# Altium PCB ART_CARD Rev 5.PcbDoc (part 5 of 13)
Units mil, origin at the board's own origin, x right, y up, seen from the top; angles counter-clockwise.
Board outline 6600.39 x 3903.54 mil, 8 copper layers (Top, Inner Layer 2, Inner Layer 3, Inner Layer 4, Inner Layer 5, Inner Layer 6, Inner Layer 7, Bottom), stack 63.111 mil thick; 542 components, 382 nets, 2410 pads, 1433 vias.
Unrouted connection lines stored in the file: 1247.
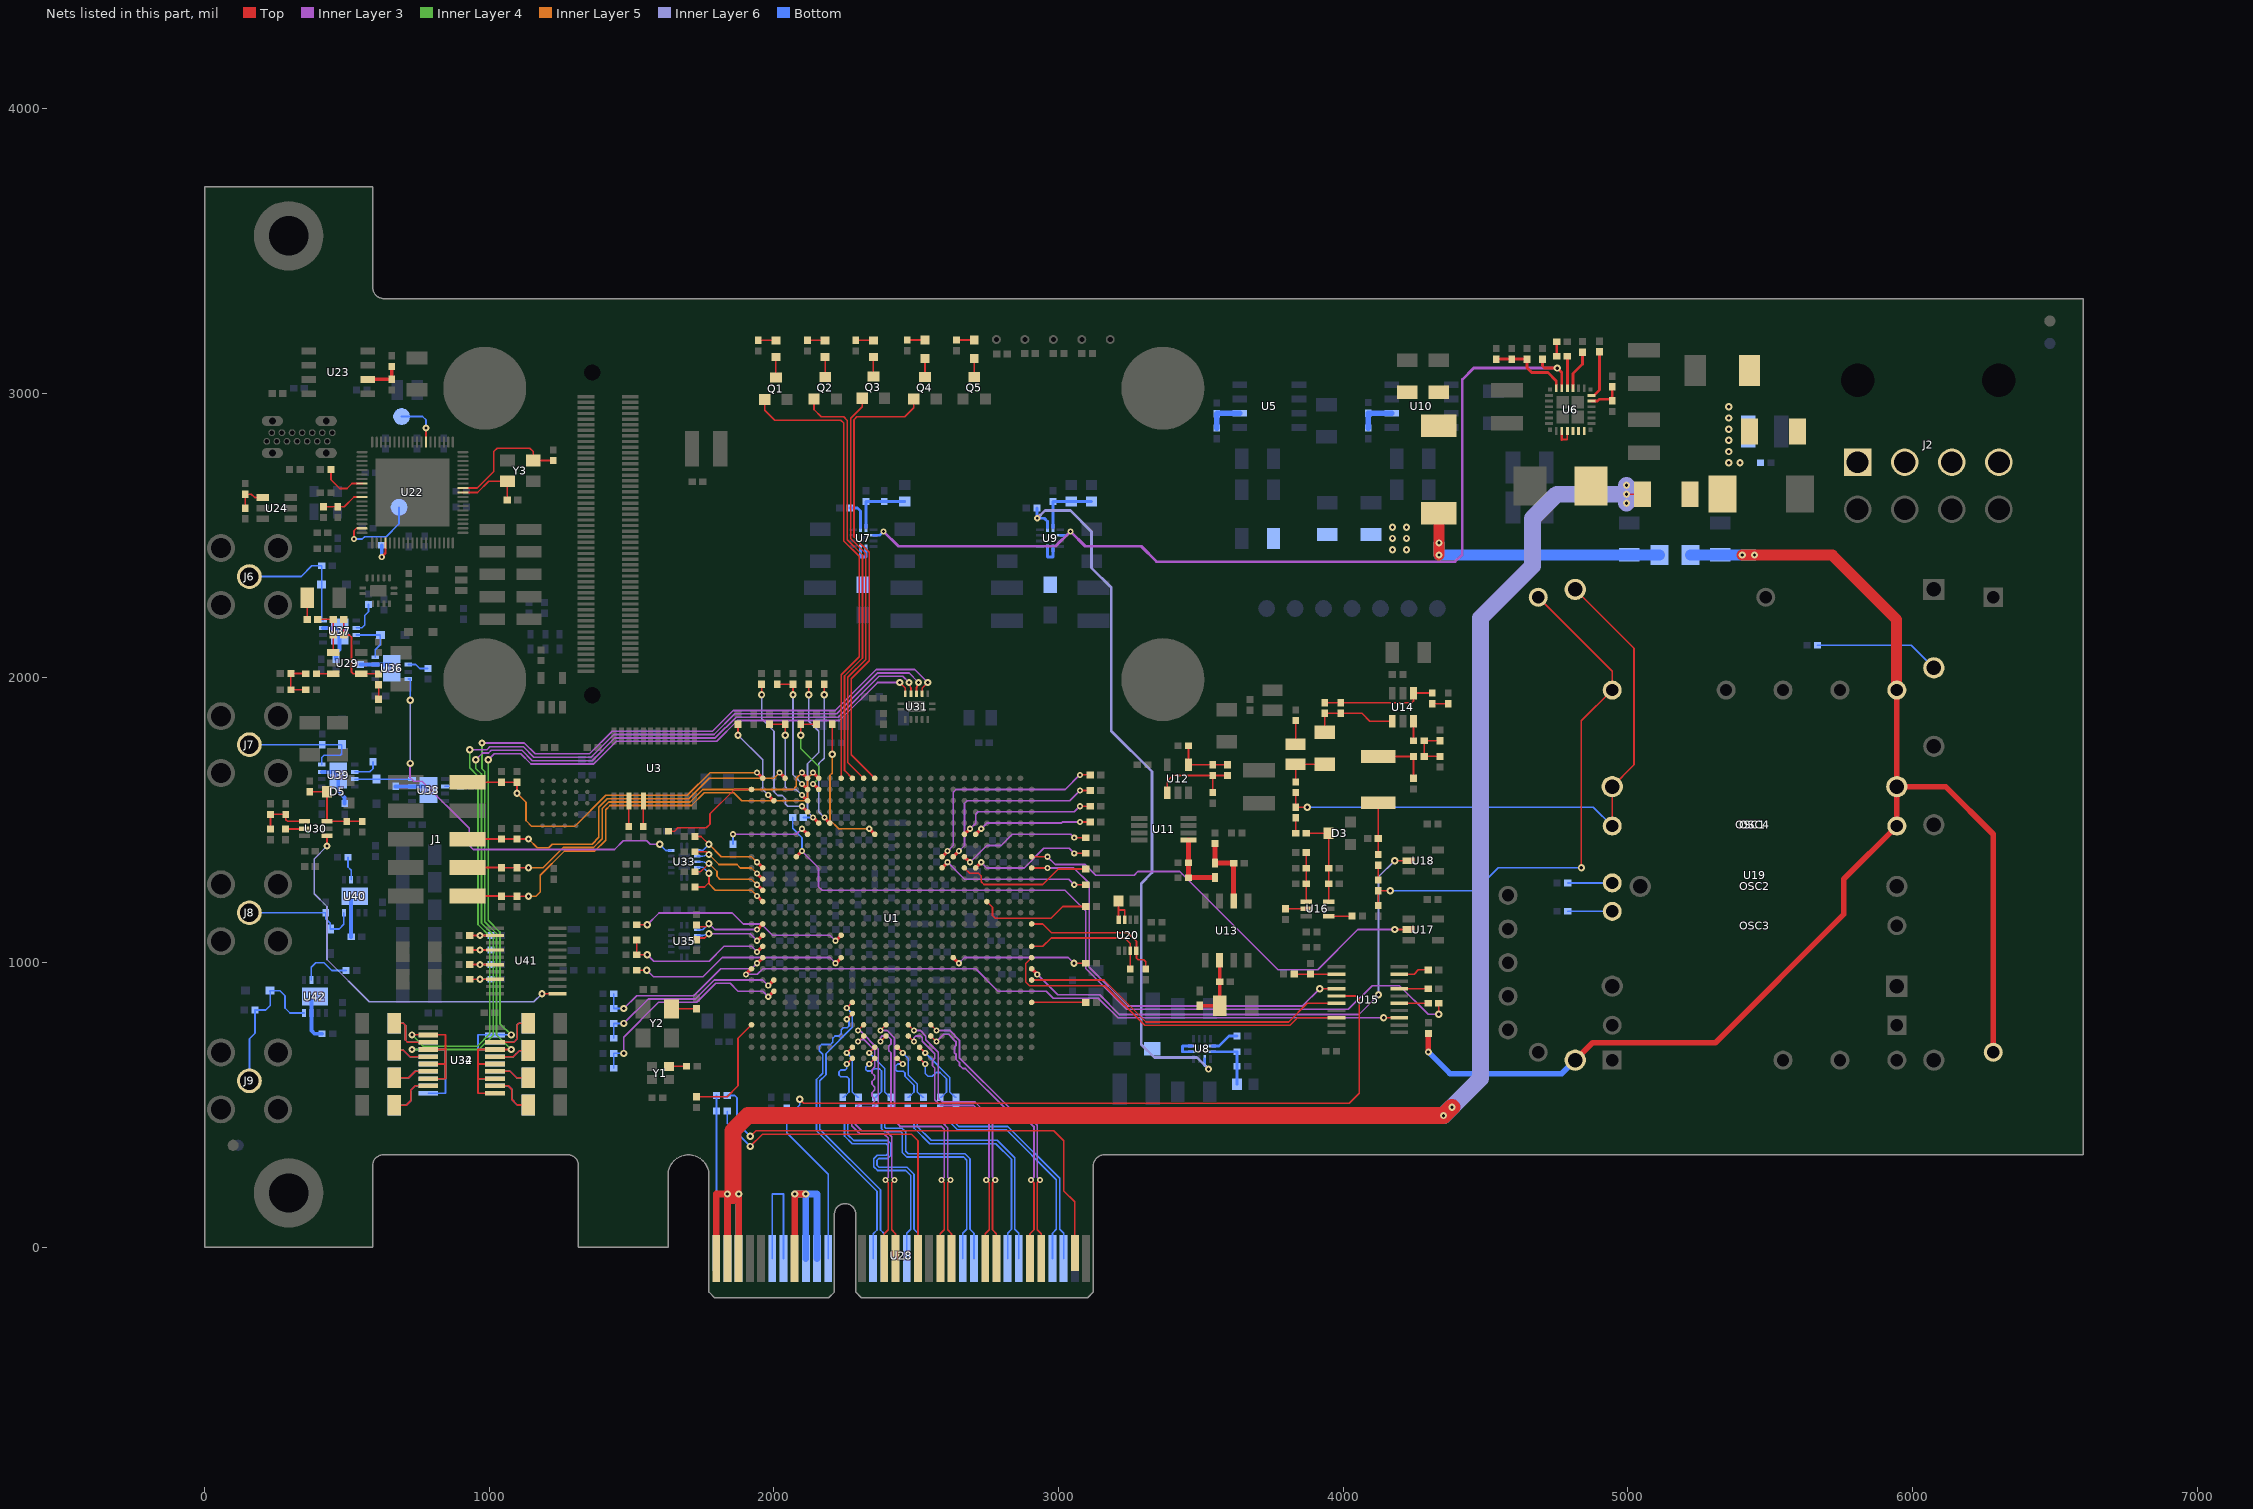
[diagram p11: the nets of this part, all layers, seen from the top]

## Via types
v1: diameter 25.59, hole 11.81, Top to Bottom, 915 vias
v2: diameter 21.65, hole 9.84, Top to Bottom, 518 vias

## Nets (pads, with @x,y where several pads share a name; then routed paths per layer and width w, separated by ;. In a path a pad name is that pad's centre, name@x,y a point inside that pad or via, vN(x,y) a via of type N, cw(c..) or ccw(c..) an arc to the next point about the centre after c; other vN are vias at no path point) (continued)
IO0: C206.1 D6.2 J6.1 U37.4 | length 465.7
  Bottom w5.91: J6.1@157.48,2356.3 339.57,2356.3 376.97,2393.7 C206.1@411.42,2393.7 D6.2@411.42,2328.74 411.42,2202.76 415.35,2202.76 U37.4@416.34,2201.77
IO1: C213.1 D7.2 J7.1 U39.4 | length 457.5
  Bottom w5.91: J7.1@157.48,1765.75 C213.1@413.39,1765.75 D7.2@482.28,1765.75 482.28,1734.25 476.38,1728.35 419.29,1728.35 411.42,1720.47 U39.4@411.42,1695.87
IO2: C217.1 J8.1 U40.4 VR5.1 | length 426.8
  Bottom w5.91: J8.1@157.48,1175.2 411.42,1175.2 C217.1@425.2,1175.2 425.2,1154.53 440.94,1138.78 VR5.1@440.94,1118.11 472.44,1118.11 489.17,1134.84 U40.4@489.17,1175.2
IO3: C222.1 J9.1 U42.4 VR6.1 | length 547.2
  Bottom w5.91: J9.1@157.48,584.65 157.48,732.28 177.17,751.97 C222.1@177.17,833.66 214.57,833.66 230.32,849.41 230.32,898.31 228.88,899.74 VR6.1@230.32,901.57 264.76,901.57 282.48,883.86 282.48,840.55 300.2,822.83 U42.4@349.41,822.83
JTAG_TCK: C79.1 J1.1 R42.1 U1.Y1 | length 1583.3
  Top w5.91: J1.1@923.23,1234.06 1043.31,1234.06 C79.1@1043.31,1233.27 R42.1@1097.44,1233.27 v1(1137.8,1233.27)
  Top w11.81: v2(2137.8,1667.32) U1.Y1@2157.48,1647.64
  Inner Layer 5 w5.91: v1(1137.8,1233.27) 1164.37,1233.27 1179.13,1248.03 1179.13,1307.09 1264.27,1392.22 1371.06,1392.22 1408.96,1430.12 1408.96,1536.91 1424.21,1552.17 1710.63,1552.17 1754.92,1596.46 1859.25,1596.46 1886.81,1568.9 2108.27,1568.9 2118.11,1578.74 2118.11,1647.64 v2(2137.8,1667.32)
JTAG_TDI: C78.1 J1.9 R37.2 U1.AE1 | length 1248.1
  Top w5.91: J1.9@923.23,1634.06 1041.34,1634.06 1041.54,1633.86 C78.1@1043.31,1633.86 R37.2@1097.44,1633.86 v1(1097.44,1594.49)
  Top w11.81: v2(1940.94,1667.32) U1.AE1@1960.63,1647.64
  Inner Layer 5 w5.91: v1(1097.44,1594.49) 1128.94,1562.99 1128.94,1499.02 1148.62,1479.33 1301.18,1479.33 1409.45,1587.6 1695.87,1587.6 1775.59,1667.32 v2(1940.94,1667.32)
JTAG_TDO: C83.1 J1.3 R39.2 U1.AA1 | length 1420.4
  Top w5.91: J1.3@923.23,1334.06 1042.91,1334.06 C83.1@1043.31,1333.66 R39.2@1097.44,1333.66 v1(1137.8,1333.66)
  Top w11.81: v2(2098.43,1667.32) U1.AA1@2118.11,1647.64
  Inner Layer 5 w5.91: v1(1137.8,1333.66) 1188.98,1333.66 1259.84,1404.53 1366.14,1404.53 1396.65,1435.04 1396.65,1541.34 1419.29,1563.98 1705.71,1563.98 1750,1608.27 2067.91,1608.27 2078.74,1619.09 2078.74,1647.64 v2(2098.43,1667.32)
JTAG_TMS: C82.1 J1.5 R38.2 U1.AC1 | length 1308.5
  Top w5.91: J1.5@923.23,1434.06 C82.1@1043.31,1434.06 R38.2@1097.44,1434.06 v1(1137.8,1434.06)
  Top w11.81: v2(2019.69,1667.32) U1.AC1@2039.37,1647.64
  Inner Layer 5 w5.91: v1(1137.8,1434.06) 1168.31,1403.54 1208.66,1403.54 1221.46,1416.34 1361.22,1416.34 1384.84,1439.96 1384.84,1546.26 1414.37,1575.79 1700.79,1575.79 1772.64,1647.64 2000,1647.64 v2(2019.69,1667.32)
JTAG_TRST: R8.2 U1.AA6 | length 313.6
  Top w11.81: v2(2098.43,1470.47) U1.AA6@2118.11,1450.79
  Inner Layer 3 w5.91: v2(1856.3,1450.79) 2078.74,1450.79 v2(2098.43,1470.47)
  Bottom w5.91: R8.2@1856.3,1415.35 v2(1856.3,1450.79)
LED_G0: Q1.1 U1.V1 | length 1630.3
  Top w5.91: Q1.1@1967.52,2978.35 1967.52,2940.94 2002.95,2905.51 2235.24,2905.51 2245.08,2895.67 2245.08,2481.3 2299.21,2427.17 2299.21,2074.8 2236.22,2011.81 U1.V1@2236.22,1647.64
LED_G1: Q2.1 U1.U1 | length 1486.8
  Top w5.91: Q2.1@2140.75,2980.31 2140.75,2942.91 2166.34,2917.32 2245.08,2917.32 2257.87,2904.53 2257.87,2485.24 2311.02,2432.09 2311.02,2422.24 2311.02,2069.88 2248.03,2006.89 2248.03,1675.2 U1.U1@2275.59,1647.64
LED_G2: Q3.1 U1.T1 | length 1422.3
  Top w5.91: Q3.1@2310.04,2982.28 2310.04,2952.76 2269.69,2912.4 2269.69,2490.16 2322.83,2437.01 2322.83,2427.17 2322.83,2064.96 2259.84,2001.97 2259.84,1702.76 U1.T1@2314.96,1647.64
LED_R0: Q4.1 U1.R1 | length 1600.5
  Top w5.91: U1.R1@2354.33,1647.64 2271.65,1730.31 2271.65,1997.05 2334.65,2060.04 2334.65,2441.93 2281.5,2495.08 2281.5,2907.48 2291.34,2917.32 2459.65,2917.32 2491.14,2948.82 Q4.1@2491.14,2980.31
MSEL0: R36.2 R44.1 U1.Y2 | length 326.8
  Top w5.91: v1(2094.49,1799.21) R44.1@2094.49,1837.6 R36.2@2149.61,1837.6
  Top w11.81: v2(2137.8,1627.95) U1.Y2@2157.48,1608.27
  Inner Layer 4 w5.91: v1(2094.49,1799.21) 2094.49,1751.97 2157.48,1688.98 2157.48,1647.64 v2(2137.8,1627.95)
MSEL1: R35.2 R43.1 U1.AA3 | length 373.7
  Top w5.91: R43.1@1984.25,1837.6 R35.2@2039.37,1837.6 v1(2039.37,1799.21)
  Top w11.81: v2(2098.43,1588.58) U1.AA3@2118.11,1568.9
  Inner Layer 6 w5.91: v1(2039.37,1799.21) 2039.37,1618.11 2049.21,1608.27 2078.74,1608.27 v2(2098.43,1588.58)
MSEL2: R34.2 R41.1 U1.AA2 | length 446.4
  Top w5.91: R41.1@2011.81,1978.35 R34.2@2066.93,1978.35 v1(2066.93,1940.94)
  Top w11.81: v2(2098.43,1627.95) U1.AA2@2118.11,1608.27
  Inner Layer 6 w5.91: v1(2066.93,1940.94) 2066.93,1659.45 v2(2098.43,1627.95)
N14301: C118.1 C119.1 L7.1 R83.2 R84.2 R85.2
  other v1: 4173.23,2450.79 4222.44,2450.79 4173.23,2490.16 4222.44,2490.16 4173.23,2529.53 4222.44,2529.53
N14373: C120.1 L7.2 L8.1 | length 963
  Top w39.37: L7.2@4335.63,2578.74 4336.61,2577.76 v1(4336.61,2474.41) v1(4336.61,2432.09)
  Bottom w5.91: v1(4336.61,2432.09) v1@4337.6,2432.09
  Bottom w39.37: v1(4336.61,2432.09) v1(4336.61,2474.41) ; v1@4337.6,2432.09 C120.1@5004.92,2432.09 L8.1@5110.24,2432.09
N16504: C172.2 R142.2 R146.1 R148.1 | length 161.8
  Top w5.91: C172.2@355.32,1958.66 R148.1@303.15,1958.66 R142.2@303.15,2015.75 354.33,2015.75 R146.1@355.32,2014.76
N16580: R146.2 U29.3 | length 59.1
  Top w5.91: R146.2@392.72,2014.76 U29.3@451.77,2014.76
N16638: C173.1 C174.1 R153.2 U29.1 | length 170.3
  Top w5.91: C173.1@397.64,2205.71 R153.2@451.77,2205.71 C174.1@451.77,2150.59 U29.1@451.77,2089.57
N16650: C173.2 R147.1 | length 75.8
  Top w5.91: C173.2@360.24,2205.71 R147.1@360.24,2281.5
N16672: C174.2 R149.1 R153.1 U29.4 | length 305.3
  Top w5.91: R153.1@489.17,2205.71 C174.2@489.17,2150.59 508.86,2150.59 515.75,2143.7 515.75,2021.65 522.64,2014.76 U29.4@550.2,2014.76 610.22,2014.76 610.72,2014.26 R149.1@611.22,2013.78
N16782: C175.1 R149.2 | length 51.2
  Top w5.91: C175.1@611.22,1925.2 R149.2@611.22,1976.38
N17996: R163.1 U32.18 | length 177.6
  Bottom w5.91: R163.1@666.34,787.4 698.82,787.4 705.71,780.51 705.71,728.35 713.58,720.47 U32.18@785.63,720.47
N18054: R164.1 U32.16 | length 128.7
  Bottom w5.91: R164.1@666.34,691.93 698.82,691.93 721.46,669.29 U32.16@785.63,669.29
N18090: R165.1 U32.14 | length 128.7
  Bottom w5.91: R165.1@666.34,595.47 717.52,595.47 740.16,618.11 U32.14@785.63,618.11
N18130: R166.1 U32.12 | length 168.8
  Bottom w5.91: R166.1@666.34,499.02 708.66,499.02 724.41,514.76 724.41,551.18 740.16,566.93 U32.12@785.63,566.93
N18188: R167.1 U32.9 | length 165.8
  Bottom w5.91: U32.9@1019.49,566.93 1066.93,566.93 1078.74,555.12 1078.74,519.69 1098.43,500 R167.1@1136.81,500
N18258: R168.1 U32.7 | length 126.7
  Bottom w5.91: U32.7@1019.49,618.11 1072.83,618.11 1095.47,595.47 R168.1@1136.81,595.47
N18322: R169.1 U32.5 | length 126.3
  Bottom w5.91: U32.5@1019.49,669.29 1084.65,669.29 1106.3,690.94 R169.1@1136.81,690.94
N18358: R170.1 U32.3 | length 173.9
  Bottom w5.91: U32.3@1019.49,720.47 1086.61,720.47 1098.43,732.28 1098.43,781.5 1104.33,787.4 R170.1@1136.81,787.4
N22150: C176.1 U28.A16 | length 834.9
  Bottom w5.91: C176.1@2242.13,489.17 2246.06,489.17 2263.78,471.46 2263.78,452.76 2250.98,439.96 2248.03,436.98 2248.03,390.75 2275.59,363.19 2394.69,363.19 2399.61,358.27 2399.61,328.71 2394.71,323.82 2363.19,323.82 2350.39,311.02 2350.39,283.46 2364.17,269.69 2462.6,269.69 2480.32,251.97 2480.32,62.99 2466.54,49.21 U28.A16@2466.54,-39.37
N22154: C177.1 U28.A17 | length 834.4
  Bottom w5.91: C177.1@2297.24,489.17 2294.29,489.17 2275.59,470.47 2275.59,447.83 2259.84,432.09 2259.84,395.64 2280.48,375 2396.65,375 2399.58,375 2411.42,363.16 2411.42,323.82 2399.61,312.01 2368.08,312.01 2362.2,306.13 2362.2,288.36 2369.07,281.5 2467.52,281.5 2492.13,256.89 2492.13,62.99 2505.91,49.21 U28.A17@2505.91,-39.37
N22277: C178.1 U28.A21 | length 818.8
  Bottom w5.91: C178.1@2356.3,489.17 2358.27,489.17 2377.95,469.49 2377.95,416.34 2387.8,406.5 2444.88,406.5 2450.79,400.59 2450.79,332.68 2466.54,316.93 2666.34,316.93 2677.17,306.1 2677.17,62.99 2663.39,49.21 U28.A21@2663.39,-39.37
N22309: C179.1 U28.A22 | length 819.4
  Bottom w5.91: C179.1@2411.42,489.17 2408.46,489.17 2389.76,470.47 2389.76,421.23 2392.69,418.31 2449.77,418.31 2462.6,405.48 2462.6,337.57 2471.43,328.74 2671.23,328.74 2688.98,310.99 2688.98,269.69 2688.98,62.99 2702.76,49.21 U28.A22@2702.76,-39.37
N30431: DS1.2 R141.1 | length 62
  Top w5.91: R141.1@1944.88,3186.02 DS1.2@2006.89,3186.02
N30439: DS1.1 Q1.3 | length 71.9
  Top w5.91: Q1.3@2006.89,3055.12 DS1.1@2006.89,3126.97
N43324: DS2.1 Q2.3 | length 69.9
  Top w5.91: Q2.3@2180.12,3057.09 DS2.1@2180.12,3126.97
N43332: DS2.2 R144.1 | length 62
  Top w5.91: R144.1@2118.11,3186.02 DS2.2@2180.12,3186.02
N43584: DS3.1 Q3.3 | length 67.9
  Top w5.91: Q3.3@2349.41,3059.06 DS3.1@2349.41,3126.97
N43592: DS3.2 R152.1 | length 62
  Top w5.91: R152.1@2287.4,3186.02 DS3.2@2349.41,3186.02
N43844: DS4.1 Q4.3 | length 65
  Top w5.91: Q4.3@2530.51,3057.09 DS4.1@2530.51,3122.05
N43852: DS4.2 R154.1 | length 63.4
  Top w5.91: R154.1@2468.5,3187.01 2527.58,3187.01 2528.53,3186.06 2530.51,3186.02 DS4.2@2530.51,3187.01
N70046: L2.1 U6.8 U6.9 U6.10 U6.11 U6.12 | length 80.7
  Top w5.91: 4767.72,2837.6 4787.4,2837.6 U6.9@4787.4,2868.11
  Top w9.84: 4767.72,2837.6 U6.8@4767.72,2868.11
N70274: C92.2 R65.2 R67.1 U6.24 | length 286.5
  Top w9.84: R67.1@4537.4,3120.08 R65.2@4591.54,3120.08 C92.2@4645.67,3120.08 4645.67,3089.57 4662.4,3072.83 4719.49,3072.83 4748.03,3044.29 U6.24@4748.03,3017.72
N70312: R64.2 R70.1 U6.17 | length 124.7
  Top w9.84: U6.17@4872.05,2972.44 4893.7,2972.44 4900.59,2979.33 R64.2@4937.01,2979.33 ; R64.2@4944.88,2973.43 4938.98,2979.33 R64.2@4937.01,2979.33 ; R70.1@4944.88,3022.64 4944.88,2987.2 R64.2@4937.01,2979.33
N70424: R68.1 U6.22 | length 112.2
  Top w9.84: U6.22@4787.4,3017.72 R68.1@4787.4,3129.92
N70428: C95.1 R68.2 | length 51.2
  Top w5.91: R68.2@4750,3129.92 R68.2@4750,3140.75
  Top w9.84: R68.2@4750,3140.75 C95.1@4750,3181.1
N70436: R71.1 U6.18 | length 170.6
  Top w9.84: U6.18@4872.05,2992.13 4880.91,2992.13 4900.59,3011.81 R71.1@4900.59,3145.67
N70452: C96.1 U6.21 | length 140.8
  Top w9.84: U6.21@4807.09,3017.72 4807.09,3068.9 4840.55,3102.36 C96.1@4840.55,3144.69
N75591: L3.1 U7.5 U7.6 | length 80.7
  Bottom w9.84: U7.6@2304.13,2455.71 2304.13,2425.2 2323.82,2425.2 U7.5@2323.82,2455.71
N75717: C99.2 R72.2 R73.1 U7.12 | length 229.3
  Bottom w9.84: U7.12@2323.82,2526.57 C99.2@2323.82,2620.08 R72.2@2387.8,2620.08 R73.1@2459.65,2620.08
N80611: OSC3.E R101.2 | length 156.7
  Bottom w5.91: R101.2@4788.39,1279.53 4856.3,1279.53 4856.69,1279.92 OSC3.E@4944.88,1279.92
N80621: OSC3.D R103.2 | length 156.6
  Bottom w5.91: R103.2@4788.39,1180.12 4788.58,1179.92 OSC3.D@4944.88,1179.92
N80719: OSC4.A R111.2 | length 441.5
  Bottom w5.91: R111.2@5666.34,2115.16 5995.08,2115.16 OSC4.A@6074.8,2035.43
N81470: C132.2 R91.2 R94.1 R96.1 | length 165.4
  Top w5.91: R96.1@4339.57,1724.41 C132.2@4284.45,1724.41 R94.1@4284.45,1779.53 R91.2@4339.57,1779.53
N81584: R92.2 R93.1 | length 52.2
  Top w5.91: R92.2@4123.03,1290.35 R93.1@4123.03,1342.52
N81592: C134.1 L11.1 R93.2 | length 181.3
  Top w5.91: R93.2@4123.03,1379.92 C134.1@4123.03,1436.02 L11.1@4123.03,1561.22
N81604: C132.1 C135.1 L11.2 | length 200.9
  Top w5.91: L11.2@4123.03,1724.21 4246.85,1724.21 C132.1@4247.05,1724.41 C135.1@4247.05,1647.64
N81628: R94.2 U14.3 | length 68.9
  Top w5.91: R94.2@4247.05,1779.53 U14.3@4247.05,1848.43
N81654: C138.1 R95.2 R99.2 U14.1 | length 315.5
  Top w5.91: R95.2@3935.04,1809.06 C138.1@3935.04,1875.98 R99.2@3991.14,1875.98 4065.94,1875.98 4093.5,1848.43 U14.1@4172.24,1848.43
N81666: L12.1 R95.1 R100.2 | length 164.9
  Top w5.91: R100.2@3832.68,1634.84 L12.1@3832.68,1697.24 3934.65,1697.24 R95.1@3935.04,1696.85
N81674: C138.2 R97.1 R99.1 U14.4 | length 408
  Top w5.91: C138.2@3935.04,1913.39 R99.1@3991.14,1913.39 4241.14,1913.39 4247.05,1919.29 U14.4@4247.05,1946.85 R97.1@4312.99,1946.85
N85114: C127.1 L9.1 R88.1 U13.6 | length 267.9
  Top w17.72: R88.1@3549.21,1418.31 L9.1@3549.21,1349.41 C127.1@3615.16,1349.41 3615.16,1216.93 U13.6@3615.55,1216.54
N85122: C123.1 C124.1 L9.2 U11.1 | length 224.4
  Top w17.72: U11.1@3456.69,1430.12 C124.1@3456.69,1350.39 C123.1@3456.69,1298.23 L9.2@3549.21,1298.23
N85362: C125.1 C126.1 L10.1 U13.2 | length 229.5
  Top w11.81: L10.1@3496.06,848.43 C125.1@3565.94,848.43 C126.1@3565.94,933.07 3565.55,933.46 U13.2@3565.55,1007.87
N85414: C129.1 R87.1 R90.2 U12.1 | length 321.7
  Top w5.91: U12.1@3381.89,1596.46 3381.89,1638.78 3400.59,1657.48 C129.1@3541.34,1657.48 ; R87.1@3541.34,1597.44 C129.1@3541.34,1657.48 ; R90.2@3593.5,1657.48 C129.1@3541.34,1657.48
N85482: C129.2 R89.2 R90.1 U12.4 | length 203.7
  Top w5.91: R89.2@3456.69,1761.81 U12.4@3456.69,1694.88 C129.2@3541.34,1694.88 R90.1@3593.5,1694.88
N90300: C143.1 R109.2 R114.1 U16.4 | length 172.2
  Top w5.91: U16.4@3870.08,1214.57 C143.1@3870.08,1276.57 R114.1@3870.08,1331.69 R109.2@3870.08,1386.81
N90304: C142.2 D3.3 R110.2 R115.1 U16.3 | length 318.9
  Top w5.91: C142.2@3870.08,1454.72 D3.3@3948.82,1454.72 R115.1@3948.82,1331.69 R110.2@3948.82,1276.57 U16.3@3948.82,1214.57
N90412: C142.1 R112.2 | length 54.1
  Top w5.91: C142.1@3832.68,1454.72 R112.2@3832.68,1508.86
N90452: R113.1 U16.1 | length 81.7
  Top w5.91: U16.1@3948.82,1163.39 R113.1@4030.51,1163.39
N90540: R116.1 U16.5 | length 72.8
  Top w5.91: R116.1@3797.24,1188.98 U16.5@3870.08,1188.98
N103339: C133.1 L12.2 | length 83.1
  Top w5.91: L12.2@3832.68,1767.32 C133.1@3832.68,1850.39
N105192: L4.1 U8.5 U8.6 | length 86.6
  Bottom w9.84: U8.5@3468.5,687.01 3435.04,687.01 3435.04,706.69 U8.6@3468.5,706.69
N105326: C102.2 R75.2 R76.1 U8.12 | length 201.8
  Bottom w9.84: U8.12@3539.37,687.01 C102.2@3626.97,687.01 R75.2@3626.97,635.83 R76.1@3626.97,572.83
N106386: L5.1 U9.5 U9.6 | length 80.7
  Bottom w9.84: U9.6@2960.63,2455.71 2960.63,2425.2 2980.32,2425.2 U9.5@2980.32,2455.71
N106520: C109.2 R78.2 R79.1 U9.12 | length 229.3
  Bottom w9.84: U9.12@2980.32,2526.57 C109.2@2980.32,2620.08 R78.2@3044.29,2620.08 R79.1@3116.14,2620.08
N108434: DS5.1 Q5.3 | length 65
  Top w5.91: Q5.3@2703.74,3057.09 DS5.1@2703.74,3122.05
N108442: DS5.2 R157.1 | length 62
  Top w5.91: R157.1@2641.73,3187.01 DS5.2@2703.74,3187.01
N146107: U28.A6 U28.A7 | length 492.1
  Bottom w5.91: U28.A6@1994.09,-39.37 1994.09,187.01 2033.46,187.01 U28.A7@2033.46,-39.37
N146531: R143.1 R145.1 U28.A1 | length 553.6
  Bottom w5.91: U28.A1@1797.24,-19.69 1798.23,-18.7 R143.1@1798.23,478.35 R145.1@1798.23,533.46
N159554: R120.2 U20.7 U20.8 | length 122
  Top w5.91: U20.8@3210.63,1150.59 3210.63,1185.04 ; R120.2@3210.63,1216.54 3210.63,1185.04 ; U20.7@3232.28,1150.59 3232.28,1185.04 3210.63,1185.04
N188972: R104.1 R106.1 U15.12 | length 148.6
  Top w5.91: R104.1@3827.76,959.65 R106.1@3884.84,959.65 U15.12@3976.38,959.65
N189592: R105.1 U15.9 | length 107.5
  Top w5.91: U15.9@4196.85,959.65 4249.02,959.65 4263.78,974.41 R105.1@4298.23,974.41
N189698: R107.1 U15.7 | length 101.4
  Top w5.91: U15.7@4196.85,908.46 R107.1@4298.23,908.46
N197075: R108.1 U15.5 | length 101.4
  Top w5.91: U15.5@4196.85,857.28 R108.1@4298.23,857.28
N203132: R40.1 Y1.3 | length 62
  Top w5.91: Y1.3@1630.91,635.83 R40.1@1692.91,635.83
N203825: R81.2 R82.1 U10.2 | length 135
  Bottom w19.68: R81.2@4087.6,2877.95 R82.1@4087.6,2930.12 4087.99,2929.72 U10.2@4170.28,2929.72
N213213: R63.2 R66.1 U5.2 | length 130.6
  Bottom w19.68: R63.2@3556.1,2877.95 R66.1@3556.1,2928.15 3557.68,2929.72 U5.2@3635.83,2929.72
N817381: C137.1 R97.2 | length 56.1
  Top w5.91: R97.2@4312.99,1909.45 C137.1@4369.09,1909.45
N16824800: R9.2 U1.W5 | length 513.2
  Top w5.91: v1(2177.17,1940.94) R9.2@2177.17,1978.35
  Top w11.81: v2(2177.17,1509.84) U1.W5@2196.85,1490.16
  Inner Layer 6 w5.91: v2(2177.17,1509.84) 2157.48,1529.53 2157.48,1699.8 2158.46,1699.8 2176.67,1718.01 2176.67,1729.82 2177.17,1730.31 v1(2177.17,1940.94)
N16824818: R10.2 U1.AD3 | length 320.9
  Top w5.91: v1(1874.02,1799.21) R10.2@1874.02,1837.6
  Top w11.81: v2(1980.32,1588.58) U1.AD3@2000,1568.9
  Inner Layer 6 w5.91: v1(1874.02,1799.21) 1960.63,1712.6 1960.63,1608.27 v2(1980.32,1588.58)
N16824856: R12.2 R15.2 U1.Y5 | length 569.9
  Top w5.91: v1(2122.05,1940.94) R12.2@2122.05,1978.35
  Top w11.81: v2(2137.8,1509.84) U1.Y5@2157.48,1490.16
  Inner Layer 6 w5.91: v1(2122.05,1940.94) 2122.05,1848.43 2157.48,1812.99 2157.48,1738.19 2118.11,1698.82 2118.11,1529.53 v2(2137.8,1509.84)
  Bottom w5.91: R15.2@2103.35,1509.84 v2(2137.8,1509.84)
N16824860: R13.2 U1.AA4 | length 554.3
  Top w5.91: v1(1956.69,1940.94) R13.2@1956.69,1978.35
  Top w11.81: v2(2098.43,1549.21) U1.AA4@2118.11,1529.53
  Inner Layer 6 w5.91: v1(1956.69,1940.94) 1956.69,1856.3 2000,1812.99 2000,1600.39 2013.29,1587.11 2029.04,1587.11 2039.37,1576.77 2039.37,1558.07 2048.23,1549.21 v2(2098.43,1549.21)
N16825229: R14.2 U1.AF2 | length 373.4
  Top w5.91: R14.2@1629.92,1461.61 1650.59,1461.61 1662.4,1473.43 1762.8,1473.43 1775.59,1486.22 1775.59,1522.64 1861.22,1608.27 U1.AF2@1921.26,1608.27
N16842932: R50.2 U1.A21 | length 190
  Top w5.91: U1.A21@2905.51,860.24 R50.2@3095.47,860.24
N16842938: R46.2 U1.AF23 | length 395.7
  Top w5.91: R46.2@1728.35,528.54 1835.63,528.54 1874.02,566.93 1874.02,734.25 U1.AF23@1921.26,781.5
N16842960: R54.2 U1.J9 | length 545.7
  Top w5.91: v2(3055.12,1273.62) R54.2@3095.47,1273.62
  Top w11.81: U1.J9@2590.55,1332.68 v2(2610.24,1352.36)
  Inner Layer 3 w5.91: v2(2610.24,1352.36) 2669.29,1293.31 3035.43,1293.31 v2(3055.12,1273.62)
N16842966: R52.2 U1.J8 | length 749.3
  Top w5.91: v2(3074.8,1659.45) R52.2@3111.22,1659.45
  Top w11.81: U1.J8@2590.55,1372.05 v2(2610.24,1391.73)
  Inner Layer 3 w5.91: v2(2610.24,1391.73) 2629.92,1411.42 2629.92,1598.43 2639.76,1608.27 3023.62,1608.27 v2(3074.8,1659.45)
N16842988: R59.2 U1.G9 | length 484.2
  Top w5.91: U1.G9@2669.29,1332.68 2687.99,1313.98 2718.5,1313.98 2728.35,1304.13 2728.35,1284.45 2738.19,1274.61 2944.88,1274.61 2999.02,1328.74 R59.2@3095.47,1328.74
N16843002: R57.2 U1.H8 | length 664
  Top w5.91: v2(3074.8,1604.33) R57.2@3111.22,1604.33
  Top w11.81: U1.H8@2629.92,1372.05 v2(2649.61,1391.73)
  Inner Layer 3 w5.91: v2(2649.61,1391.73) 2669.29,1411.42 2669.29,1559.06 2679.13,1568.9 3039.37,1568.9 v2(3074.8,1604.33)
N16843016: R60.2 U1.G8 | length 480
  Top w5.91: v2(3055.12,1438.98) R60.2@3095.47,1438.98
  Top w11.81: U1.G8@2669.29,1372.05 v2(2688.98,1352.36)
  Inner Layer 3 w5.91: v2(2688.98,1352.36) 2748.03,1411.42 2798.23,1411.42 2837.6,1450.79 3043.31,1450.79 v2(3055.12,1438.98)
N16843022: R61.2 U1.F9 | length 439
  Top w5.91: v2(3055.12,1383.86) R61.2@3095.47,1383.86
  Top w11.81: U1.F9@2708.66,1332.68 v2(2728.35,1352.36)
  Inner Layer 3 w5.91: v2(2728.35,1352.36) 2748.03,1332.68 2878.94,1332.68 2947.83,1401.57 3037.4,1401.57 v2(3055.12,1383.86)
N16844376: R1.2 U1.V15 | length 784.1
  Top w5.91: R1.2@1517.72,1132.87 v1(1555.12,1132.87)
  Top w11.81: v2(2216.54,1076.77) U1.V15@2236.22,1096.46
  Inner Layer 3 w5.91: v1(1555.12,1132.87) 1596.46,1174.21 1853.84,1174.21 1892.22,1135.83 1955.71,1135.83 1995.08,1096.46 2196.85,1096.46 v2(2216.54,1076.77)
N16844390: R2.2 U1.V17 | length 772.7
  Top w5.91: R2.2@1517.72,973.43 v1(1553.15,973.43)
  Top w11.81: v2(2216.54,998.03) U1.V17@2236.22,1017.72
  Inner Layer 3 w5.91: v1(1553.15,973.43) 1576.77,949.8 1750.98,949.8 1818.9,1017.72 2196.85,1017.72 v2(2216.54,998.03)
N16844404: R3.2 U1.H17 | length 490
  Top w5.91: v1(3054.13,998.03) R3.2@3095.47,998.03
  Top w11.81: U1.H17@2629.92,1017.72 v2(2649.61,998.03)
  Inner Layer 3 w5.91: v2(2649.61,998.03) 2669.29,1017.72 3034.45,1017.72 v1(3054.13,998.03)
N16844418: R4.2 U1.E12 | length 406.3
  Top w5.91: U1.E12@2748.03,1214.57 2767.72,1194.88 2767.72,1165.35 2777.56,1155.51 2973.43,1155.51 3014.76,1196.85 R4.2@3095.47,1196.85
N16844430: R5.2 U1.R6 | length 518.1
  Top w5.91: v1(2204.72,1732.28) R5.2@2204.72,1837.6
  Top w11.81: v2(2334.65,1470.47) U1.R6@2354.33,1450.79
  Inner Layer 5 w5.91: v1(2204.72,1732.28) 2204.72,1665.35 2196.85,1657.48 2196.85,1500.98 2227.36,1470.47 v2(2334.65,1470.47)
N16844444: R6.2 U1.G6 | length 501.1
  Top w5.91: v2(3074.8,1549.21) R6.2@3111.22,1549.21
  Top w11.81: U1.G6@2669.29,1450.79 v2(2688.98,1470.47)
  Inner Layer 3 w5.91: v2(2688.98,1470.47) 2708.66,1490.16 2708.66,1521.65 2716.54,1529.53 3055.12,1529.53 v2(3074.8,1549.21)
N16844450: R7.2 U1.F6 | length 420.5
  Top w5.91: v2(3074.8,1494.09) R7.2@3111.22,1494.09
  Top w11.81: U1.F6@2708.66,1450.79 v2(2728.35,1470.47)
  Inner Layer 3 w5.91: v2(2728.35,1470.47) 2748.03,1490.16 3009.84,1490.16 3013.78,1494.09 v2(3074.8,1494.09)
N16883644: C180.1 U28.A25 | length 822.9
  Bottom w5.91: C180.1@2470.47,489.17 2473.43,489.17 2492.13,470.47 2492.13,419.29 2547.24,364.17 2779.56,364.17 2834.65,309.08 2834.65,62.99 2820.87,49.21 U28.A25@2820.87,-39.37
N16883660: C181.1 U28.A26 | length 822.9
  Bottom w5.91: C181.1@2525.59,489.17 2522.64,489.17 2503.94,470.47 2503.94,424.21 2552.17,375.98 2784.45,375.98 2846.46,313.98 2846.46,62.99 2860.24,49.21 U28.A26@2860.24,-39.37
N16883714: C182.1 U28.A29 | length 805.7
  Bottom w5.91: C182.1@2584.65,489.17 2587.6,489.17 2606.3,470.47 2606.3,453.74 2606.3,450.82 2644.71,412.4 2647.64,412.4 2816.96,412.4 2992.13,237.23 2992.13,62.99 2978.35,49.21 U28.A29@2978.35,-39.37
N16883730: C183.1 U28.A30 | length 805.7
  Bottom w5.91: C183.1@2639.76,489.17 2636.81,489.17 2618.11,470.47 2618.11,455.71 2649.61,424.21 2821.85,424.21 3003.94,242.13 3003.94,62.99 3017.72,49.21 U28.A30@3017.72,-39.37
N17065441: R45.1 Y2.3 | length 87.8
  Top w5.91: Y2.3@1640.55,837.6 R45.1@1728.35,837.6
N17066890: C187.1 R155.2 R158.1 U30.4 | length 192.4
  Top w5.91: R155.2@231.3,1469.49 R158.1@231.3,1520.67 C187.1@285.43,1520.67 285.43,1501.97 291.34,1496.06 U30.4@351.38,1496.06
N17066892: C186.2 D5.3 R156.2 R159.1 U30.3 | length 289.4
  Top w5.91: C186.2@369.09,1600.39 D5.3@430.12,1600.39 U30.3@430.12,1496.06 R159.1@499.02,1496.06 R156.2@554.13,1496.06
N17066951: R160.1 U30.5 | length 67.3
  Top w5.91: R160.1@284.45,1469.49 350.39,1469.49 U30.5@351.38,1470.47
N17100553: R171.1 U34.18 | length 173.9
  Top w5.91: U34.18@1019.49,720.47 1086.61,720.47 1098.43,732.28 1098.43,781.5 1104.33,787.4 R171.1@1136.81,787.4
N17100582: R174.1 U34.16 | length 126.3
  Top w5.91: U34.16@1019.49,669.29 1084.65,669.29 1106.3,690.94 R174.1@1136.81,690.94
N17100600: R172.1 U34.14 | length 126.7
  Top w5.91: U34.14@1019.49,618.11 1072.83,618.11 1095.47,595.47 R172.1@1136.81,595.47
N17100628: R173.1 U34.12 | length 165.8
  Top w5.91: U34.12@1019.49,566.93 1066.93,566.93 1078.74,555.12 1078.74,519.69 1098.43,500 R173.1@1136.81,500
N17100659: R175.1 U34.9 | length 168.8
  Top w5.91: R175.1@666.34,499.02 708.66,499.02 724.41,514.76 724.41,551.18 740.16,566.93 U34.9@785.63,566.93
N17100688: R176.1 U34.7 | length 128.7
  Top w5.91: R176.1@666.34,595.47 717.52,595.47 740.16,618.11 U34.7@785.63,618.11
N17100708: R177.1 U34.5 | length 128.7
  Top w5.91: R177.1@666.34,691.93 698.82,691.93 721.46,669.29 U34.5@785.63,669.29
N17100726: R178.1 U34.3 | length 177.6
  Top w5.91: R178.1@666.34,787.4 698.82,787.4 705.71,780.51 705.71,728.35 713.58,720.47 U34.3@785.63,720.47
N17112216: C201.1 U36.3 U36.9 | length 123
  Bottom w13.78: C201.1@547.24,2047.24 U36.3@599.41,2047.24 657.48,2047.24 U36.9@657.48,2034.45
N17113553: C203.1 U36.6 | length 74.6
  Bottom w5.91: U36.6@715.55,2047.24 742.13,2047.24 755.91,2033.46 C203.1@784.45,2033.46
N17118066: C209.1 U38.3 U38.9 | length 128
  Bottom w13.78: C209.1@671.26,1619.09 U38.3@728.35,1619.09 786.42,1619.09 U38.9@786.42,1606.3
N17118094: C211.1 U38.6 | length 54.1
  Bottom w5.91: U38.6@844.49,1619.09 C211.1@898.62,1619.09
N17120426: C215.1 U40.3 U40.9 | length 155.5
  Bottom w13.78: C215.1@514.76,1090.55 U40.3@514.76,1175.2 514.76,1233.27 U40.9@527.56,1233.27
N17120454: C216.1 U40.6 | length 83.2
  Bottom w5.91: C216.1@503.94,1370.08 503.94,1335.63 514.76,1324.8 U40.6@514.76,1291.34
N17121838: C220.1 U42.3 U42.9 | length 174.8
  Bottom w13.78: U42.9@387.8,880.91 375,880.91 U42.3@375,822.83 375,760.83 385.83,750 C220.1@412.4,750
N17121877: C221.1 U42.6 | length 185.3
  Bottom w5.91: U42.6@375,938.98 375,984.25 390.75,1000 419.29,1000 446.85,972.44 C221.1@497.05,972.44
N17144230: C202.1 U37.3 U37.9 | length 173.6
  Bottom w13.78: U37.3@416.34,2176.18 474.41,2176.18 U37.9@474.41,2163.39 474.41,2099.41 461.61,2086.61 C202.1@461.61,2065.94
N17144255: C204.1 U37.6 | length 111.7
  Bottom w5.91: U37.6@532.48,2176.18 553.15,2176.18 562.99,2186.02 562.99,2219.49 575.79,2232.28 C204.1@575.79,2257.87
N17144636: U36.4 U37.7 VR3.1 | length 169.7
  Bottom w5.91: U37.7@532.48,2150.59 VR3.1@617.13,2150.59 617.13,2117.13 599.41,2099.41 U36.4@599.41,2072.83
N17146061: C210.1 U39.3 U39.9 | length 171.2
  Bottom w13.78: U39.3@411.42,1670.28 456.69,1670.28 U39.9@469.49,1657.48 469.49,1602.36 492.13,1579.72 C210.1@492.13,1559.06
N17146073: U38.4 U39.7 VR4.1 | length 200.8
  Bottom w5.91: U39.7@527.56,1644.69 VR4.1@604.33,1644.69 U38.4@728.35,1644.69
N17146091: C212.1 U39.6 | length 93.1
  Bottom w5.91: U39.6@527.56,1670.28 580.71,1670.28 591.54,1681.1 C212.1@591.54,1705.71
N17212690: C115.1 C116.1 D1.1 D2.1 L6.1 VR1.1
  other v1: 5354.33,2755.91 5393.7,2755.91 5354.33,2795.28 5354.33,2834.65 5354.33,2874.02 5354.33,2913.39 5354.33,2952.76
N17212740: D2.2 J2.1 J2.2 J2.3 J2.4
N17327842: R130.1 U22.4 | length 96.3
  Top w7.87: v2(622.05,2425.2) 635.83,2438.98 U22.4@635.83,2474.41
  Bottom w11.81: v2(622.05,2425.2) R130.1@622.05,2466.54
N17329629: R137.2 R138.1 U24.1 | length 116.1
  Top w5.91: R138.1@142.72,2596.46 R137.2@142.72,2645.67 164.37,2645.67 176.18,2633.86 U24.1@204.72,2633.86
N17338123: R129.2 U22.65 | length 165.6
  Top w5.91: R129.2@443.9,2732.28 443.9,2695.87 474.41,2665.35 500,2665.35 517.72,2683.07 U22.65@553.15,2683.07
N17339397: C166.1 U22.29 Y3.3 | length 238.7
  Top w5.91: U22.29@907.48,2651.57 958.66,2651.57 998.03,2690.94 Y3.3@1062.99,2690.94 ; C166.1@1062.99,2625 Y3.3@1062.99,2690.94 ; Y3.3@1063.98,2690.94 Y3.3@1062.99,2690.94
N17339404: C165.1 U22.30 Y3.1 | length 452.1
  Top w5.91: U22.30@907.48,2667.32 957.68,2667.32 1015.75,2725.39 1015.75,2795.28 1027.56,2807.09 1142.72,2807.09 1154.53,2795.28 Y3.1@1154.53,2763.78 C165.1@1224.41,2763.78
N17347693: R135.2 R136.1 U23.2 | length 129.1
  Top w11.81: U23.2@573.82,3048.82 657.09,3048.82 R135.2@657.48,3049.21 R136.1@657.48,3094.49
N17395302: R49.2 U3.15 | length 89.6
  Top w5.91: R49.2@1490.16,1478.35 U3.15@1490.16,1567.91
N17395307: R47.2 U3.17 | length 89.6
  Top w5.91: R47.2@1541.34,1478.35 U3.17@1541.34,1567.91
N17398486: R131.2 R132.1 U22.68 | length 150.1
  Top w5.91: R132.1@417.32,2601.38 440.94,2601.38 R131.2@467.52,2601.38 490.16,2601.38 524.61,2635.83 U22.68@553.15,2635.83
OSC_BITE: U1.A19 U15.16 | length 1159.3
  Top w5.91: U1.A19@2905.51,938.98 3159.45,938.98 3307.09,791.34 3808.07,791.34 3874.02,857.28 U15.16@3976.38,857.28
OSC_ID0: R19.2 R27.1 U1.AE16 | length 542.4
  Top w5.91: R27.1@1517.72,1079.72 R19.2@1517.72,1027.56 v1(1555.12,1027.56)
  Top w11.81: v2(1940.94,1037.4) U1.AE16@1960.63,1057.09
  Inner Layer 3 w5.91: v1(1555.12,1027.56) 1577.76,1004.92 1772.64,1004.92 1824.8,1057.09 1921.26,1057.09 v2(1940.94,1037.4)
OSC_ID1: R18.2 R26.1 U1.AE17 | length 650
  Top w11.81: v2(1940.94,998.03) U1.AE17@1960.63,1017.72
  Inner Layer 3 w5.91: v1(1472.44,838.58) 1517.72,883.86 1718.5,883.86 1812.99,978.35 1921.26,978.35 v2(1940.94,998.03)
  Bottom w5.91: R26.1@1437.01,890.75 R18.2@1437.01,838.58 v1(1472.44,838.58)
OSC_ID2: R17.2 R25.1 U1.AD19 | length 694.7
  Top w11.81: v2(1980.32,919.29) U1.AD19@2000,938.98
  Inner Layer 3 w5.91: v1(1472.44,786.42) 1558.07,872.05 1723.43,872.05 1790.35,938.98 1960.63,938.98 v2(1980.32,919.29)
  Bottom w5.91: R17.2@1437.01,734.25 R25.1@1437.01,786.42 v1(1472.44,786.42)
OSC_ID3: R16.2 R24.1 U1.AD20 | length 778.2
  Top w11.81: v2(1980.32,879.92) U1.AD20@2000,899.61
  Inner Layer 3 w5.91: v1(1472.44,681.1) 1472.44,738.19 1594.49,860.24 1728.35,860.24 1795.28,927.17 1846.46,927.17 1874.02,899.61 1960.63,899.61 v2(1980.32,879.92)
  Bottom w5.91: R16.2@1437.01,628.94 R24.1@1437.01,681.1 v1(1472.44,681.1)
OSC_POWER: C122.1 L8.2 OSC1.5 OSC2.3 OSC3.3 OSC4.4 R102.1 U19.7 | length 4935
  Top w19.68: v1(4299.21,686.02) R102.1@4299.21,750.98 ; OSC4.4@4814.96,657.48 4875.98,718.5 5307.09,718.5 5757.87,1169.29 5757.87,1292.91 OSC3.3@5944.88,1479.92 OSC2.3@5944.88,1618.11 ; U19.7@5944.88,1957.48 OSC2.3@5944.88,1618.11 ; OSC1.5@6283.46,685.04 6283.46,1450.79 6116.14,1618.11 OSC2.3@5944.88,1618.11
  Top w39.37: v1(5401.57,2432.09) v1(5444.88,2432.09) 5717.52,2432.09 5943.9,2205.71 5943.9,1968.5 5944.88,1967.52 U19.7@5944.88,1957.48
  Bottom w19.68: v1(4299.21,686.02) 4375,610.24 4767.72,610.24 OSC4.4@4814.96,657.48
  Bottom w39.37: L8.2@5220.47,2432.09 C122.1@5324.8,2432.09 v1(5401.57,2432.09) v1(5444.88,2432.09)
OSC_PPS_IN: U1.A18 U18.2 | length 1857.8
  Top w5.91: v1(4181.1,1358.27) U18.2@4230.32,1358.27
  Top w11.81: U1.A18@2905.51,978.35 v2(2925.2,958.66)
  Inner Layer 3 w5.91: v2(2925.2,958.66) 2997.05,886.81 3144.69,886.81 3213.58,817.91 4055.12,817.91 v1(4124.02,886.81)
  Inner Layer 6 w5.91: v1(4124.02,886.81) 4124.02,1301.18 v1(4181.1,1358.27)
OSC_PPS_OUT: U1.A17 U15.18 | length 1259.9
  Top w5.91: U1.A17@2905.51,1017.72 2884.84,997.05 2884.84,932.09 2897.64,919.29 3162.4,919.29 3302.17,779.53 3812.99,779.53 3839.57,806.1 U15.18@3976.38,806.1
OSC_RX: U1.A8 U17.2 | length 1558
  Top w5.91: U1.A8@2905.51,1372.05 v2(2960.63,1372.05) ; v1(4181.1,1116.14) U17.2@4230.32,1116.14
  Inner Layer 3 w5.91: v2(2960.63,1372.05) 2988.19,1344.49 3093.5,1344.49 3130.91,1307.09 3265.75,1307.09 3278.54,1319.88 3426.18,1319.88 3770.67,975.39 3910.43,975.39 4051.18,1116.14 v1(4181.1,1116.14)
OSC_SCL: R118.2 U1.A16 U20.3 | length 456.4
  Top w5.91: U1.A16@2905.51,1057.09 2944.88,1057.09 2974.41,1086.61 3232.28,1086.61 3251.97,1066.93 U20.3@3251.97,1042.32 R118.2@3251.97,977.36
OSC_SDA: R119.2 U1.A14 U20.4 | length 515.8
  Top w5.91: U1.A14@2905.51,1135.83 2944.88,1135.83 2975.39,1105.31 3243.11,1105.31 3273.62,1074.8 U20.4@3273.62,1042.32 3273.62,1015.75 3279.53,1009.84 3299.21,1009.84 3306.1,1002.95 R119.2@3306.1,977.36
OSC_SINUS: OSC2.4 OSC3.4 OSC4.5 R100.1 R112.1 | length 2139.4
  Top w5.91: R100.1@3832.68,1597.44 R112.1@3832.68,1546.26 v1(3874.02,1546.26) ; OSC4.5@4814.96,2311.02 5021.65,2104.33 5021.65,1694.88 OSC2.4@4944.88,1618.11 OSC3.4@4944.88,1479.92
  Bottom w5.91: v1(3874.02,1546.26) 4878.54,1546.26 OSC3.4@4944.88,1479.92
OSC_SQUARE: OSC1.3 R92.1 R117.1 U19.12 | length 1901.5
  Top w5.91: R117.1@4123.03,1200.79 R92.1@4123.03,1252.95 v1(4165.35,1252.95) ; OSC1.3@4685.04,2283.46 4944.88,2023.62 U19.12@4944.88,1957.48 4836.61,1849.21 v1(4836.61,1333.66)
  Bottom w5.91: v1(4165.35,1252.95) 4463.58,1252.95 4544.29,1333.66 v1(4836.61,1333.66)
OSC_TX: U1.A9 U15.14 | length 1469.5
  Top w5.91: U1.A9@2905.51,1332.68 v2(2960.63,1332.68) ; v1(3917.32,908.46) U15.14@3976.38,908.46
  Inner Layer 3 w5.91: v2(2960.63,1332.68) 3053.15,1332.68 3107.28,1278.54 3107.28,1250 3107.28,1170.28 3107.28,984.25 3244.09,847.44 3856.3,847.44 v1(3917.32,908.46)
PCIE_3.3V: U28.A9 U28.A10 U28.B8 | length 797.2
  Top w23.62: U28.B8@2072.83,-39.37 v1(2072.83,187.01) v1(2112.2,187.01)
  Bottom w23.62: v1(2072.83,187.01) v1(2112.2,187.01) ; U28.A9@2112.2,-39.37 v1(2112.2,187.01) ; U28.A10@2151.57,-39.37 2151.57,187.01 v1(2112.2,187.01)
PCIE_12.0V: D1.2 U28.A2 U28.A3 U28.B1 U28.B2 U28.B3 | length 6751.5
  Top w5.91: v1(4995.08,2645.67) D1.2@5050.79,2645.67
  Top w23.62: U28.B1@1797.24,-39.37 1797.24,187.01 v1(1836.61,187.01) ; U28.B2@1836.61,-39.37 1836.61,181.1 v1(1836.61,187.01) ; U28.B3@1875.98,-39.37 1875.98,181.1 v1(1875.98,187.01) 1856.3,181.1 v1(1836.61,187.01)
  Top w59.06: 1856.3,181.1 1856.3,187.01 1856.3,409.45 1909.45,462.6 v1(4352.36,462.6) v1(4381.89,492.13)
  Inner Layer 6 w59.06: v1(4352.36,462.6) v1(4381.89,492.13) 4482.28,592.52 4482.28,2210.63 4665.35,2393.7 4665.35,2561.02 4750,2645.67 v1(4995.08,2645.67) ; v1(4995.08,2614.17) v1(4995.08,2645.67) ; v1(4995.08,2677.17) v1(4995.08,2645.67)
  Bottom w23.62: U28.A2@1836.61,-39.37 v1(1836.61,187.01) v1(1875.98,187.01) U28.A3@1875.98,-39.37
PCIE_PERSTN: R15.1 R108.2 U1.AB8 | length 2899
  Top w5.91: v1(4335.63,818.9) R108.2@4335.63,857.28
  Top w11.81: U1.AB8@2078.74,1372.05 v2(2098.43,1391.73)
  Inner Layer 3 w5.91: v2(2098.43,1391.73) 2156.5,1333.66 2156.5,1266.73 2169.29,1253.94 3022.64,1253.94 3095.47,1181.1 3095.47,979.33 3239.17,835.63 4017.72,835.63 4101.38,919.29 4197.83,919.29 4298.23,818.9 v1(4335.63,818.9)
  Bottom w5.91: R15.1@2065.94,1509.84 2065.94,1471.46 2098.43,1438.98 v2(2098.43,1391.73)
PCIE_REFCLKN: U1.U21 U28.A14 | length 1057
  Top w5.91: v2(2255.91,840.55) U1.U21@2275.59,860.24
  Bottom w5.91: v2(2255.91,840.55) 2275.59,820.87 2275.59,772.67 2183.07,680.15 2183.07,606.3 2161.42,584.65 2161.42,414.7 2374.21,201.91 2374.21,60.83 2387.8,47.24 U28.A14@2387.8,-39.37
PCIE_REFCLKP: U1.U22 U28.A13 | length 1056.9
  Top w5.91: v2(2255.91,801.18) U1.U22@2275.59,820.87
  Bottom w5.91: v2(2255.91,801.18) 2263.78,793.31 2263.78,777.56 2257.87,771.65 2244.09,771.65 2236.22,763.78 2236.22,750 2228.35,742.13 2214.57,742.13 2206.69,734.25 2206.69,720.47 2198.82,712.6 2167.32,712.6 2159.45,704.72 2159.45,690.29 2171.26,678.48 2171.26,611.19 2149.61,589.54 2149.61,409.25 2362.01,196.85 2362.01,60.83 2348.43,47.24 U28.A13@2348.43,-39.37
PCIE_RXN0: U1.T23 U28.B15 | length 1036.6
  Top w5.91: v2(2295.28,761.81) U1.T23@2314.96,781.5 ; v2(2423.23,236.22) 2413.39,226.38 2413.39,122.05 2413.39,61.02 2427.17,47.24 U28.B15@2427.17,-39.37
  Inner Layer 3 w6.3: v2(2295.28,761.81) 2301.28,761.81 2366.73,696.36 2366.73,683.07 2366.73,643.7 2366.73,602.17 2366.73,562.8 2366.73,521.46 2366.73,510.69 2366.73,508.72 2349.94,491.93 2308.2,491.93 2285.43,469.16 2285.43,432.61 2308.4,409.65 2392.85,409.65 2413.58,388.91 2413.58,245.87 v2(2423.23,236.22)
PCIE_RXN1: U1.P23 U28.B20 | length 1038.9
  Top w5.91: v2(2374.02,761.81) U1.P23@2393.7,781.5 ; v2(2620.08,236.22) 2610.24,226.38 2610.24,122.05 2610.24,61.02 2624.02,47.24 U28.B20@2624.02,-39.37
  Inner Layer 3 w6.3: v2(2374.02,761.81) 2397.18,761.81 2423.43,735.57 2423.43,461.75 2448.17,437.01 2592.52,437.01 2610.43,419.09 2610.43,245.87 v2(2620.08,236.22)
PCIE_RXN2: U1.M23 U28.B24 | length 1037.4
  Top w5.91: U1.M23@2472.44,781.5 v2(2492.13,761.81) ; v2(2777.56,236.22) 2767.72,226.38 2767.72,122.05 2767.72,61.02 2781.5,47.24 U28.B24@2781.5,-39.37
  Inner Layer 3 w6.3: v2(2492.13,761.81) 2513.32,761.81 2533.46,741.67 2533.46,728.35 2577.17,684.65 2577.17,523.62 2590.55,510.24 2706.5,510.24 2767.91,448.82 2767.91,245.87 v2(2777.56,236.22)
PCIE_RXN3: U1.K23 U28.B28 | length 1038.2
  Top w5.91: U1.K23@2551.18,781.5 v2(2570.87,761.81) ; v2(2935.04,236.22) 2925.2,226.38 2925.2,122.05 2925.2,61.02 2938.98,47.24 U28.B28@2938.98,-39.37
  Inner Layer 3 w6.3: v2(2570.87,761.81) 2617.26,761.81 2651.57,727.5 2651.57,666.47 2827.69,490.35 2864.17,490.35 2925.39,429.13 2925.39,245.87 v2(2935.04,236.22)
PCIE_RXP0: U1.T24 U28.B14 | length 1036.6
  Top w5.91: v2(2295.28,722.44) U1.T24@2314.96,742.13 ; U28.B14@2387.8,-39.37 2387.8,47.24 2401.57,61.02 2401.57,122.05 2401.57,226.38 v2(2391.73,236.22)
  Inner Layer 3 w6.3: v2(2295.28,722.44) 2303.15,730.31 2315.52,730.31 2354.53,691.31 2354.53,683.07 2354.53,643.7 2354.53,633.86 2344.49,623.82 2344.49,612.2 2354.53,602.17 2354.53,592.52 2344.49,582.48 2344.49,572.83 2354.53,562.8 2354.53,553.15 2344.49,543.11 2344.49,531.5 2354.53,521.46 2354.53,513.78 2344.88,504.13 2303.15,504.13 2273.23,474.21 2273.23,469.16 2273.23,427.56 2303.35,397.44 2387.8,397.44 2401.38,383.86 2401.38,245.87 v2(2391.73,236.22)
PCIE_RXP1: U1.P24 U28.B19 | length 1038.1
  Top w5.91: v2(2374.02,722.44) U1.P24@2393.7,742.13 ; U28.B19@2584.65,-39.37 2584.65,47.24 2598.43,61.02 2598.43,122.05 2598.43,226.38 v2(2588.58,236.22)
  Inner Layer 3 w6.3: v2(2374.02,722.44) 2374.02,736.22 2379.92,742.13 2399.61,742.13 2411.22,730.51 2411.22,714.37 2403.54,706.69 2403.54,690.73 2411.22,683.05 2411.22,456.69 2443.11,424.8 2587.46,424.8 2598.23,414.04 2598.23,245.87 v2(2588.58,236.22)
PCIE_RXP2: U1.M24 U28.B23 | length 1036.8
  Top w5.91: U1.M24@2472.44,742.13 v2(2492.13,722.44) ; U28.B23@2742.13,-39.37 2742.13,47.24 2755.91,61.02 2755.91,122.05 2755.91,226.38 v2(2746.06,236.22)
  Inner Layer 3 w6.3: v2(2492.13,722.44) 2492.13,736.22 2498.03,742.13 2515.75,742.13 2521.26,736.61 2521.26,723.29 2564.96,679.59 2564.96,663.39 2557.09,655.51 2557.09,637.8 2564.96,629.92 2564.96,518.57 2585.5,498.03 2701.44,498.03 2755.71,443.76 2755.71,245.87 v2(2746.06,236.22)
PCIE_RXP3: U1.K24 U28.B27 | length 1038
  Top w5.91: U1.K24@2551.18,742.13 v2(2570.87,722.44) ; U28.B27@2899.61,-39.37 2899.61,47.24 2913.39,61.02 2913.39,122.05 2913.39,226.38 v2(2903.54,236.22)
  Inner Layer 3 w6.3: v2(2570.87,722.44) 2596.46,748.03 2613.78,748.03 2639.37,722.44 2639.37,708.66 2633.86,703.15 2633.86,684.07 2639.37,678.56 2639.37,661.42 2651.57,649.21 2651.57,639.76 2663.39,627.95 2672.83,627.95 2822.64,478.15 2859.12,478.15 2913.19,424.08 2913.19,245.87 v2(2903.54,236.22)
PCIE_TXN0: C177.2 U1.U25 | length 203.2
  Top w5.91: v2(2255.91,683.07) U1.U25@2275.59,702.76
  Bottom w5.91: v2(2255.91,683.07) 2275.59,663.39 2275.59,545.28 2294.29,526.57 C177.2@2297.24,526.57
PCIE_TXN1: C179.2 U1.R25 | length 217.9
  Top w5.91: v2(2334.65,683.07) U1.R25@2354.33,702.76
  Bottom w5.91: v2(2334.65,683.07) 2389.76,627.95 2389.76,545.28 2408.46,526.57 C179.2@2411.42,526.57
PCIE_TXN2: C181.2 U1.N25 | length 216.2
  Top w5.91: U1.N25@2433.07,702.76 v2(2452.76,683.07)
  Bottom w5.91: v2(2452.76,683.07) 2472.44,663.39 2472.44,605.31 2503.94,573.82 2503.94,545.28 2522.64,526.57 C181.2@2525.59,526.57
PCIE_TXN3: C183.2 U1.L25 | length 230.9
  Top w5.91: U1.L25@2511.81,702.76 v2(2531.5,683.07)
  Bottom w5.91: v2(2531.5,683.07) 2618.11,596.46 2618.11,545.28 2636.81,526.57 C183.2@2639.76,526.57
PCIE_TXP0: C176.2 U1.U26 | length 204.2
  Top w5.91: v2(2255.91,643.7) U1.U26@2275.59,663.39
  Bottom w5.91: C176.2@2242.13,526.57 2245.08,526.57 2263.78,545.28 2263.78,591.54 2255.91,599.41 2234.25,599.41 2228.35,605.31 2228.35,617.13 2234.25,623.03 2250.98,623.03 2255.91,627.95 v2(2255.91,643.7)
PCIE_TXP1: C178.2 U1.R26 | length 218.7
  Top w5.91: v2(2334.65,643.7) U1.R26@2354.33,663.39
  Bottom w5.91: v2(2334.65,643.7) 2322.86,631.92 2322.86,624.02 2327.78,619.09 2344.49,619.09 2352.36,626.97 2370.08,626.97 2377.95,619.09 2377.95,546.26 2358.27,526.57 C178.2@2356.3,526.57
PCIE_TXP2: C180.2 U1.N26 | length 216.2
  Top w5.91: U1.N26@2433.07,663.39 v2(2452.76,643.7)
  Bottom w5.91: v2(2452.76,643.7) 2435.04,643.7 2427.17,635.83 2427.17,624.02 2433.07,618.11 2454.72,618.11 2460.63,612.2 2460.63,600.39 2492.13,568.9 2492.13,545.28 2473.43,526.57 C180.2@2470.47,526.57
PCIE_TXP3: C182.2 U1.L26 | length 230.9
  Top w5.91: U1.L26@2511.81,663.39 v2(2531.5,643.7)
  Bottom w5.91: v2(2531.5,643.7) 2531.5,610.24 2541.34,600.39 2556.1,600.39 2569.88,614.17 2583.66,614.17 2606.3,591.54 2606.3,545.28 2587.6,526.57 C182.2@2584.65,526.57
PCIE_WAKEN: U1.AF18 U15.3 | length 2402.6
  Top w5.91: v1(4141.73,806.1) U15.3@4196.85,806.1
  Top w11.81: v2(1901.57,958.66) U1.AF18@1921.26,978.35
  Inner Layer 3 w5.91: v2(1901.57,958.66) 1941.93,958.66 1961.61,978.35 2708.66,978.35 2787.4,899.61 2956.69,899.61 2981.3,875 3139.76,875 3208.66,806.1 v1(4141.73,806.1)
PERSTN: R151.1 U15.15 U28.A11 | length 3058
  Top w5.91: v1(2090.55,519.69) 2104.33,505.91 4020.67,505.91 4056.1,541.34 4056.1,870.08 4043.31,882.87 U15.15@3976.38,882.87
  Bottom w5.91: v1(2090.55,519.69) 2090.55,500 2079.72,489.17 R151.1@2045.28,489.17 2045.28,402.56 2190.94,256.89 U28.A11@2190.94,-39.37
PGOOD_0V9: R80.1 U8.2 U9.11 | length 2551
  Inner Layer 6 w9.84: v2(2925.2,2561.02) 2952.26,2588.09 3041.83,2588.09 3116.14,2513.78 3116.14,2386.81 3185.04,2317.91 3185.04,1813.98 3327.76,1671.26 3327.76,1315.94 3290.35,1278.54 3290.35,712.6 3336.61,666.34 3486.22,666.34 v1(3526.57,625.98)
  Bottom w9.84: R80.1@2924.21,2597.44 2924.21,2561.02 v2(2925.2,2561.02) 2949.8,2561.02 2960.63,2550.2 U9.11@2960.63,2526.57 ; U8.2@3513.78,661.42 3513.78,638.78 v1(3526.57,625.98)
PGOOD_0V95: R77.1 U8.11 | length 102.3
  Bottom w9.84: U8.11@3539.37,706.69 3562.99,706.69 3598.43,742.13 R77.1@3626.97,742.13
PGOOD_1V8: R74.1 U7.11 | length 100.9
  Bottom w9.84: R74.1@2267.72,2597.44 2293.31,2597.44 2304.13,2586.61 U7.11@2304.13,2526.57
PGOOD_5V0: R69.1 U6.23 U7.2 U9.2 | length 3334.6
  Top w9.84: R69.1@4699.8,3120.08 4699.8,3096.46 4707.68,3088.58 v1(4751.97,3088.58) 4767.72,3072.83 U6.23@4767.72,3017.72
  Inner Layer 3 w9.84: v2(2384.84,2514.76) 2437.01,2462.6 2989.17,2462.6 v2(3041.34,2514.76) 3093.5,2462.6 3290.35,2462.6 3344.49,2408.46 4392.72,2408.46 4418.31,2434.06 4418.31,3048.23 4458.66,3088.58 v1(4751.97,3088.58)
  Bottom w9.84: U7.2@2349.41,2500.98 2371.06,2500.98 v2(2384.84,2514.76) ; U9.2@3005.91,2500.98 3027.56,2500.98 v2(3041.34,2514.76)
PRSNT2N_X1: R143.2 U28.B17 | length 1186.8
  Top w5.91: v1(1917.32,354.33) 1959.7,396.71 2483.21,396.71 2505.91,374.02 U28.B17@2505.91,-39.37
  Bottom w5.91: R143.2@1835.63,478.35 1835.63,436.02 v1(1917.32,354.33)
PRSNT2N_X4: R145.2 U28.B31 | length 1726.9
  Top w5.91: v1(1917.32,389.76) 1937.01,409.45 2983.27,409.45 3018.7,374.02 3018.7,197.83 3057.09,159.45 U28.B31@3057.09,-19.69
  Bottom w5.91: R145.2@1835.63,533.46 1862.2,533.46 1870.08,525.59 1870.08,437.01 v1(1917.32,389.76)
PWRENN: PD2.1 U22.75 | length 299.3
  Top w5.91: v2(524.61,2488.19) 524.61,2516.73 533.46,2525.59 U22.75@553.15,2525.59
  Bottom w5.91: v2(524.61,2488.19) 554.13,2488.19 562.01,2496.06 637.8,2496.06 683.07,2541.34 PD2.1@683.07,2599.41
SEL_IO0: R179.2 U1.AE9 U33.2 | length 334.2
  Top w5.91: R179.2@1722.44,1442.91 1744.09,1442.91 v1(1771.65,1415.35)
  Top w11.81: v2(1940.94,1352.36) U1.AE9@1960.63,1332.68
  Inner Layer 5 w5.91: v1(1771.65,1415.35) 1814.96,1372.05 1921.26,1372.05 v2(1940.94,1352.36)
  Bottom w5.91: U33.2@1730.32,1393.7 1750,1393.7 v1(1771.65,1415.35)
SEL_IO0F: R183.2 U1.AE14 U35.2 | length 309.7
  Top w5.91: R183.2@1728.35,1131.89 1728.35,1125.98 1760.83,1125.98 v1(1771.65,1136.81)
  Top w11.81: v2(1940.94,1116.14) U1.AE14@1960.63,1135.83
  Inner Layer 3 w5.91: v1(1771.65,1136.81) 1792.32,1116.14 v2(1940.94,1116.14)
  Bottom w5.91: U35.2@1730.32,1115.16 1750,1115.16 v1(1771.65,1136.81)
SEL_IO1: R180.2 U1.AE10 U33.3 | length 320.3
  Top w5.91: R180.2@1722.44,1389.76 1761.81,1389.76 v1(1771.65,1379.92)
  Top w11.81: v2(1940.94,1312.99) U1.AE10@1960.63,1293.31
  Inner Layer 5 w5.91: v1(1771.65,1379.92) 1807.09,1344.49 1870.08,1344.49 1881.89,1332.68 1921.26,1332.68 v2(1940.94,1312.99)
  Bottom w5.91: U33.3@1730.32,1374.02 1750,1374.02 v1(1771.65,1379.92)
SEL_IO1F: R184.2 U1.AE15 U35.3 | length 304.8
  Top w5.91: R184.2@1728.35,1080.71 1728.35,1086.61 1756.89,1086.61 v1(1771.65,1101.38)
  Top w11.81: v2(1940.94,1076.77) U1.AE15@1960.63,1096.46
  Inner Layer 3 w5.91: v1(1771.65,1101.38) 1916.34,1101.38 v2(1940.94,1076.77)
  Bottom w5.91: U35.3@1730.32,1095.47 1750,1095.47 v1(1771.65,1101.38)
SEL_IO2: R181.2 U1.AE11 U33.4 | length 341.5
  Top w5.91: R181.2@1722.44,1318.9 1742.13,1318.9 v1(1771.65,1348.43)
  Top w11.81: v2(1940.94,1273.62) U1.AE11@1960.63,1253.94
  Inner Layer 5 w5.91: v1(1771.65,1348.43) 1800.2,1319.88 1800.2,1303.15 1810.04,1293.31 1921.26,1293.31 v2(1940.94,1273.62)
  Bottom w5.91: U33.4@1730.32,1354.33 1750,1354.33 v1(1771.65,1348.43)
SEL_IO3: R182.2 U1.AE12 U33.5 | length 390.2
  Top w5.91: R182.2@1722.44,1265.75 1755.91,1265.75 1771.65,1281.5 v1(1771.65,1313.98)
  Top w11.81: v2(1940.94,1234.25) U1.AE12@1960.63,1214.57
  Inner Layer 5 w5.91: v1(1771.65,1313.98) 1771.65,1276.57 1794.29,1253.94 1921.26,1253.94 v2(1940.94,1234.25)
  Bottom w5.91: U33.5@1730.32,1334.65 1750.98,1334.65 v1(1771.65,1313.98)
SUSPENDN: PD1.1 U22.45 | length 168.3
  Top w5.91: U22.45@777.56,2828.74 v1(777.56,2877.95)
  Bottom w5.91: PD1.1@691.93,2918.31 765.75,2918.31 777.56,2906.5 v1(777.56,2877.95)
U_DCLS_IN0: R185.2 R188.1 U41.2 | length 127
  Top w5.91: R185.2@931.1,1095.47 v1(967.52,1095.47) U41.2@1019.69,1095.47
  Bottom w5.91: v1(967.52,1095.47) R188.1@1005.91,1095.47
U_DCLS_IN1: R189.2 R192.1 U41.4 | length 127
  Top w5.91: R189.2@931.1,1044.29 v1(967.52,1044.29) U41.4@1019.69,1044.29
  Bottom w5.91: v1(967.52,1044.29) R192.1@1005.91,1044.29
U_DCLS_IN2: R193.2 R196.1 U41.6 | length 127
  Top w5.91: R193.2@931.1,993.11 v1(967.52,993.11) U41.6@1019.69,993.11
  Bottom w5.91: v1(967.52,993.11) R196.1@1005.91,993.11
U_DCLS_IN3: R197.2 R200.1 U41.8 | length 127
  Top w5.91: R197.2@931.1,941.93 v1(967.52,941.93) U41.8@1019.69,941.93
  Bottom w5.91: v1(967.52,941.93) R200.1@1005.91,941.93
U_DCLS_OUT0: U31.13 U32.2 U32.4 U32.6 U32.8 | length 3082.3
  Top w5.91: v1(2441.93,1984.25) 2461.61,1964.57 U31.13@2461.61,1944.88
  Inner Layer 3 w5.91: v1(996.06,1712.6) 1017.72,1734.25 1110.24,1734.25 1146.65,1697.83 1367.13,1697.83 1446.85,1777.56 1799.21,1777.56 1872.05,1850.39 2230.32,1850.39 2364.17,1984.25 v1(2441.93,1984.25)
  Inner Layer 4 w5.91: v1(996.06,1712.6) 996.06,1148.62 1037.4,1107.28 1037.4,785.43 v1(1076.77,746.06)
  Bottom w5.91: U32.8@1019.49,592.52 960.63,592.52 960.63,643.7 ; U32.6@1019.49,643.7 960.63,643.7 ; U32.4@1019.49,694.88 960.63,694.88 ; v1(1076.77,746.06) U32.2@1019.49,746.06 960.63,746.06 960.63,694.88 ; 960.63,643.7 960.63,694.88
U_DCLS_OUT1: U31.12 U32.11 U32.13 U32.15 U32.17 | length 3476
  Top w5.91: v1(2474.41,1984.25) 2481.3,1964.57 U31.12@2481.3,1944.88
  Inner Layer 3 w5.91: v1(952.76,1712.6) 976.38,1736.22 997.05,1736.22 1006.89,1746.06 1115.16,1746.06 1151.57,1709.65 1362.2,1709.65 1441.93,1789.37 1794.29,1789.37 1867.13,1862.2 2225.39,1862.2 2369.09,2005.91 2452.76,2005.91 v1(2474.41,1984.25)
  Inner Layer 4 w5.91: v1(728.35,694.88) 963.58,694.88 1013.78,745.08 1013.78,1097.44 972.44,1138.78 972.44,1662.4 952.76,1682.09 v1(952.76,1712.6)
  Bottom w5.91: v1(728.35,694.88) U32.17@785.63,694.88 846.46,694.88 846.46,643.7 ; U32.11@785.63,541.34 846.46,541.34 846.46,592.52 ; U32.13@785.63,592.52 846.46,592.52 ; U32.15@785.63,643.7 846.46,643.7 ; 846.46,592.52 846.46,643.7
U_DCLS_OUT2: U31.11 U34.2 U34.4 U34.6 U34.8 | length 3562.4
  Top w5.91: v1(728.35,746.06) U34.2@785.63,746.06 846.46,746.06 846.46,694.88 ; U34.8@785.63,592.52 846.46,592.52 846.46,643.7 ; U34.6@785.63,643.7 846.46,643.7 ; U34.4@785.63,694.88 846.46,694.88 ; U31.11@2500.98,1944.88 2500.98,1964.57 v1(2507.87,1984.25) ; 846.46,643.7 846.46,694.88
  Inner Layer 3 w5.91: v1(931.1,1748.03) 992.13,1748.03 1001.97,1757.87 1120.08,1757.87 1156.5,1721.46 1357.28,1721.46 1437.01,1801.18 1789.37,1801.18 1862.2,1874.02 2220.47,1874.02 2364.17,2017.72 2474.41,2017.72 v1(2507.87,1984.25)
  Inner Layer 4 w5.91: v1(728.35,746.06) 767.72,706.69 958.66,706.69 1001.97,750 1001.97,1092.52 960.63,1133.86 960.63,1654.53 931.1,1684.06 v1(931.1,1748.03)
U_DCLS_OUT3: U31.10 U34.11 U34.13 U34.15 U34.17 | length 3336.3
  Top w5.91: U34.11@1019.49,541.34 960.63,541.34 960.63,592.52 ; U34.13@1019.49,592.52 960.63,592.52 ; U34.15@1019.49,643.7 960.63,643.7 ; v1(1076.77,694.88) U34.17@1019.49,694.88 960.63,694.88 960.63,643.7 ; U31.10@2520.67,1944.88 2520.67,1964.57 v1(2540.35,1984.25) ; 960.63,592.52 960.63,643.7
  Inner Layer 3 w5.91: v1(974.41,1771.65) 1123.03,1771.65 1161.42,1733.27 1352.36,1733.27 1432.09,1812.99 1784.45,1812.99 1857.28,1885.83 2215.55,1885.83 2359.25,2029.53 2495.08,2029.53 v1(2540.35,1984.25)
  Inner Layer 4 w5.91: v1(974.41,1771.65) 974.41,1681.1 984.25,1671.26 984.25,1143.7 1025.59,1102.36 1025.59,746.06 v1(1076.77,694.88)
U_FREQ_IN: U30.1 U41.11 | length 1355
  Top w5.91: v1(430.12,1409.45) U30.1@430.12,1444.88 ; v1(1185.04,890.75) U41.11@1240.16,890.75
  Inner Layer 6 w5.91: v1(430.12,1409.45) 384.84,1364.17 384.84,1242.13 430.12,1196.85 430.12,1010.83 578.74,862.2 1156.5,862.2 v1(1185.04,890.75)
U_SEL_IO0: U33.13 U36.8 | length 1437.8
  Inner Layer 3 w5.91: v1(722.44,1699.8) 721.46,1698.82 721.46,1650.59 735.24,1636.81 763.78,1636.81 929.13,1471.46 929.13,1412.4 943.9,1397.64 1439.96,1397.64 1470.96,1428.64 1552.66,1428.64 1565.94,1415.35 v1(1598.43,1415.35)
  Inner Layer 6 w5.91: v1(722.44,1699.8) v1(722.44,1921.26)
  Bottom w5.91: U36.8@715.55,1996.06 722.44,1996.06 v1(722.44,1921.26) ; v1(1598.43,1415.35) 1620.08,1393.7 U33.13@1639.76,1393.7